# Altium PCB PCB1.PcbDoc
Units mm, origin at the board's own origin, x right, y up, seen from the top; angles counter-clockwise.
Board outline 152.4 x 101.6 mm, 2 copper layers (Top Layer, Bottom Layer); 20 components, 7 nets, 157 pads, 1 vias.
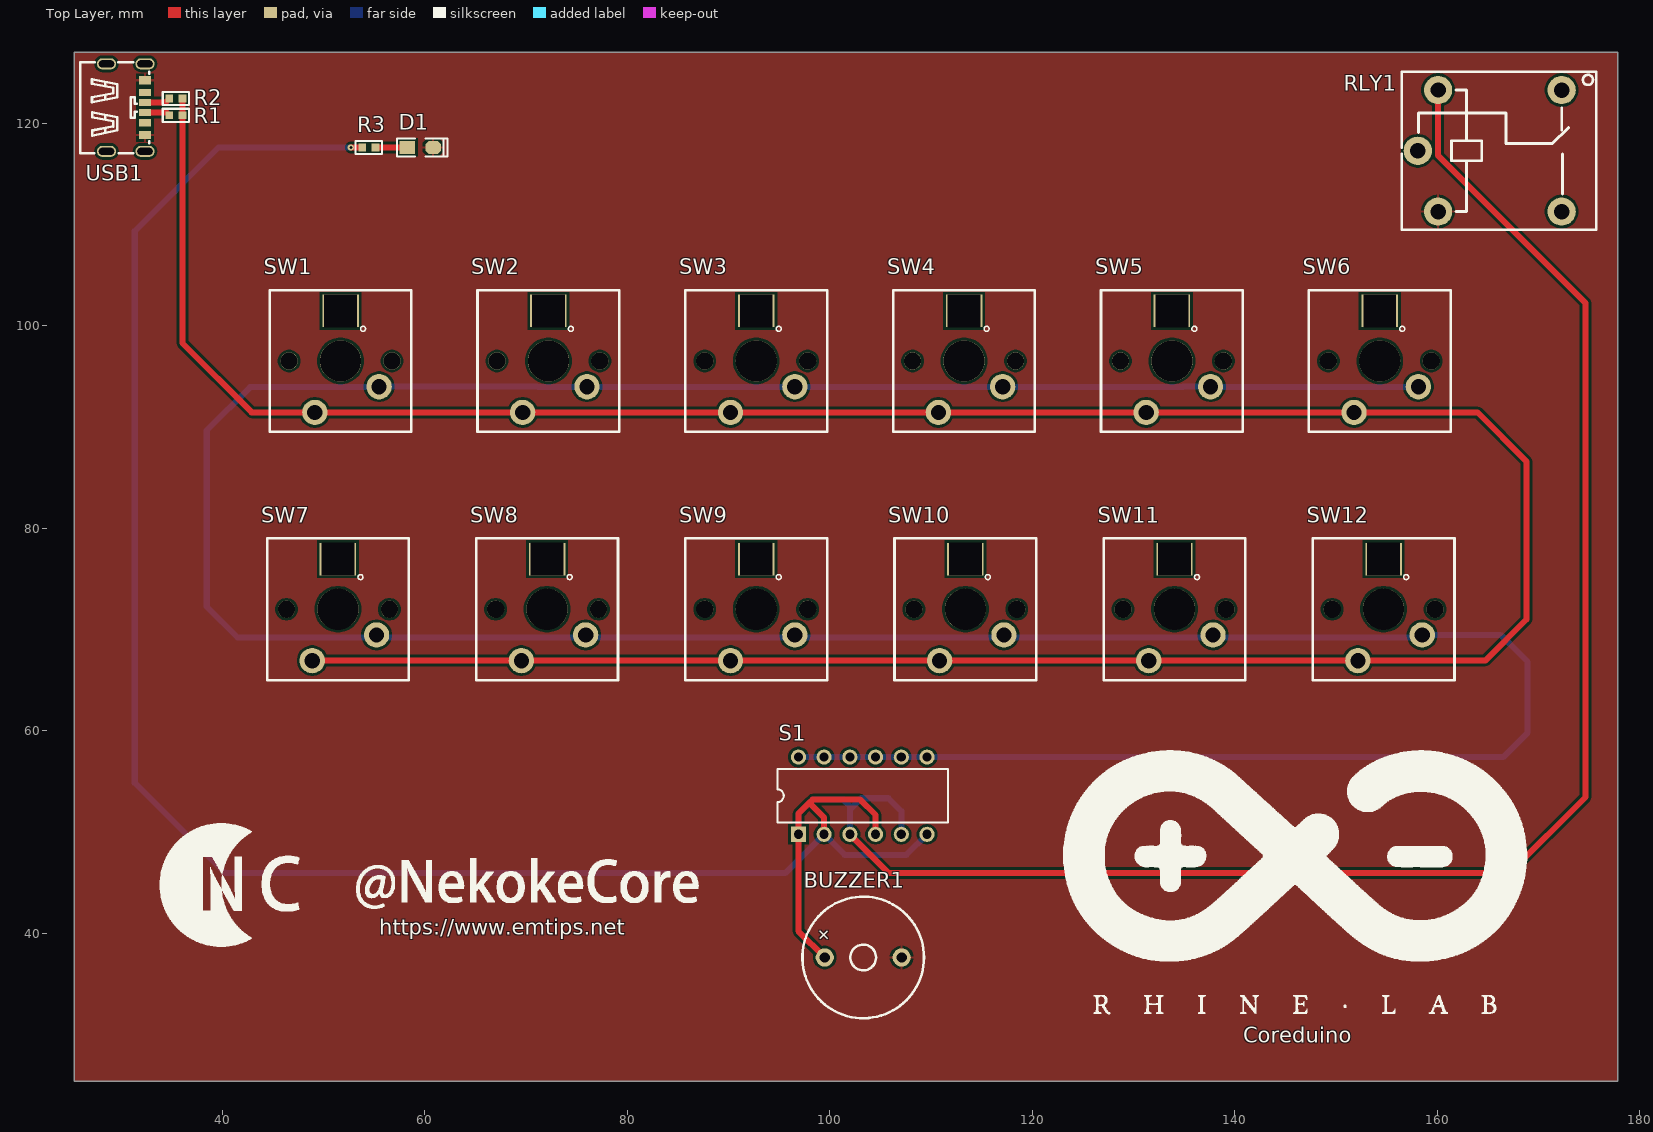
[diagram p0: Top Layer view]
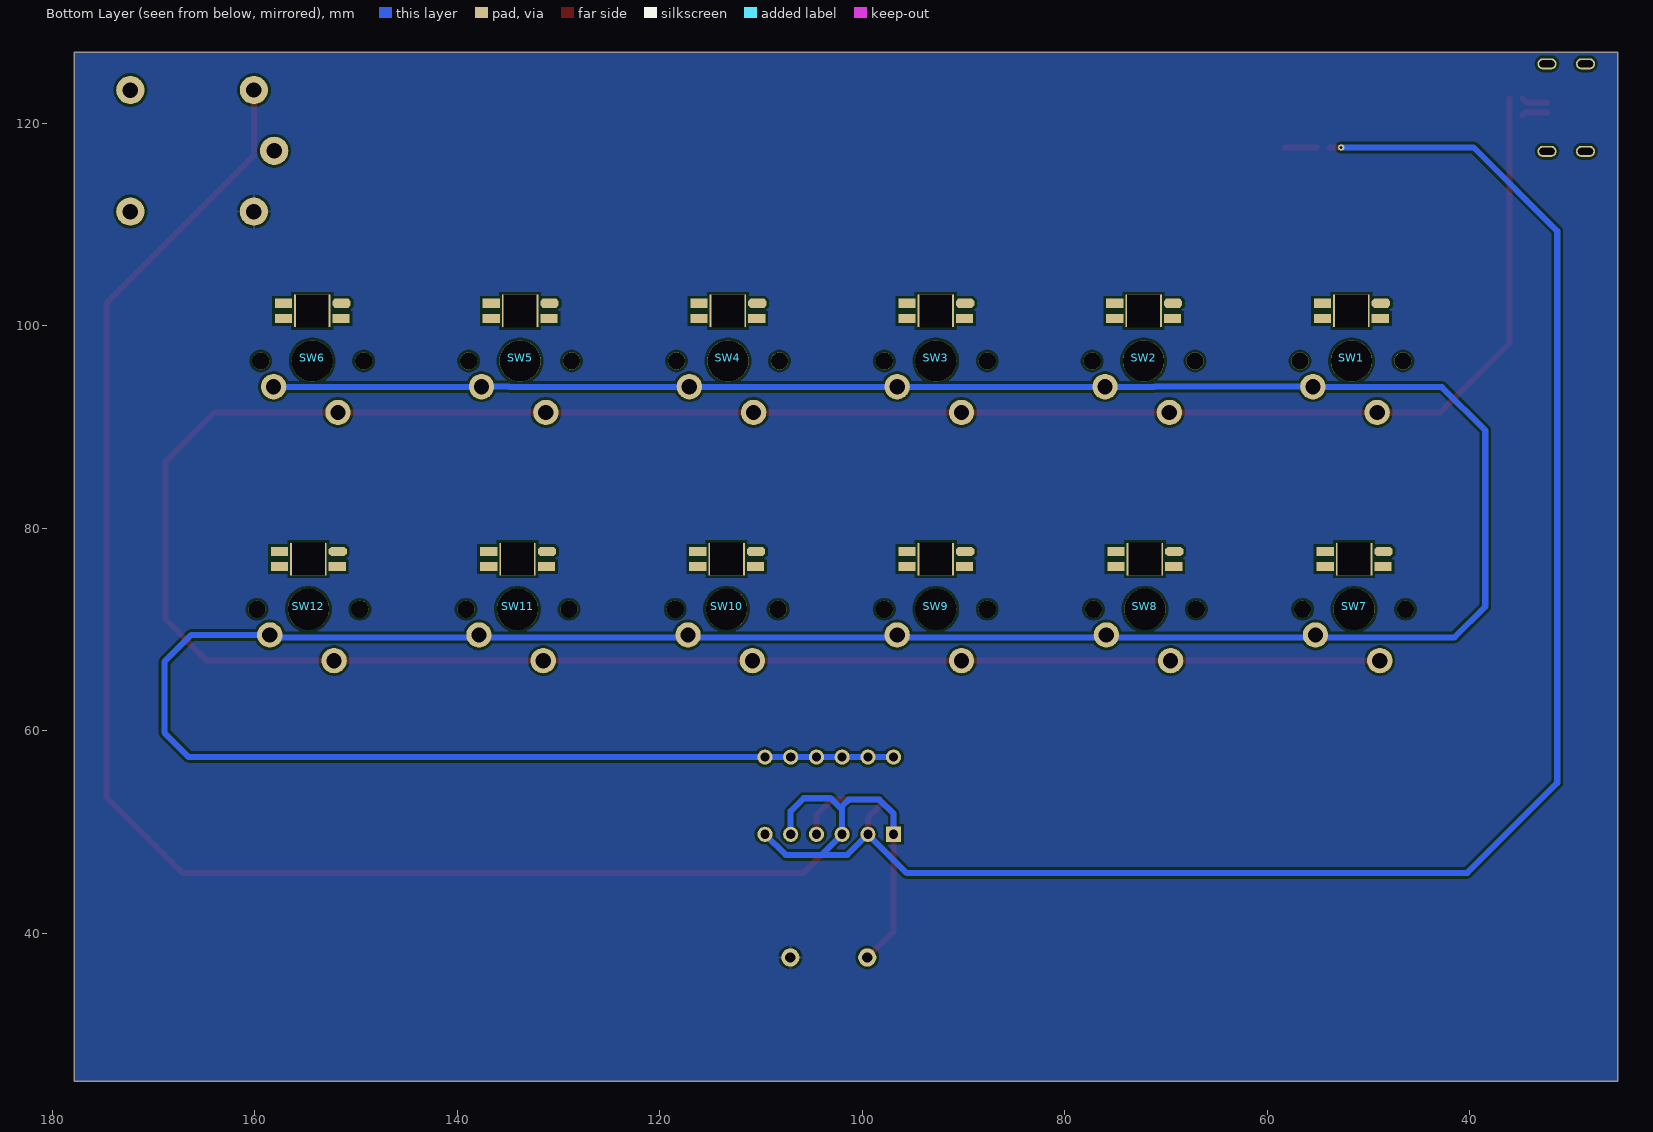
[diagram p1: Bottom Layer view, seen from below]
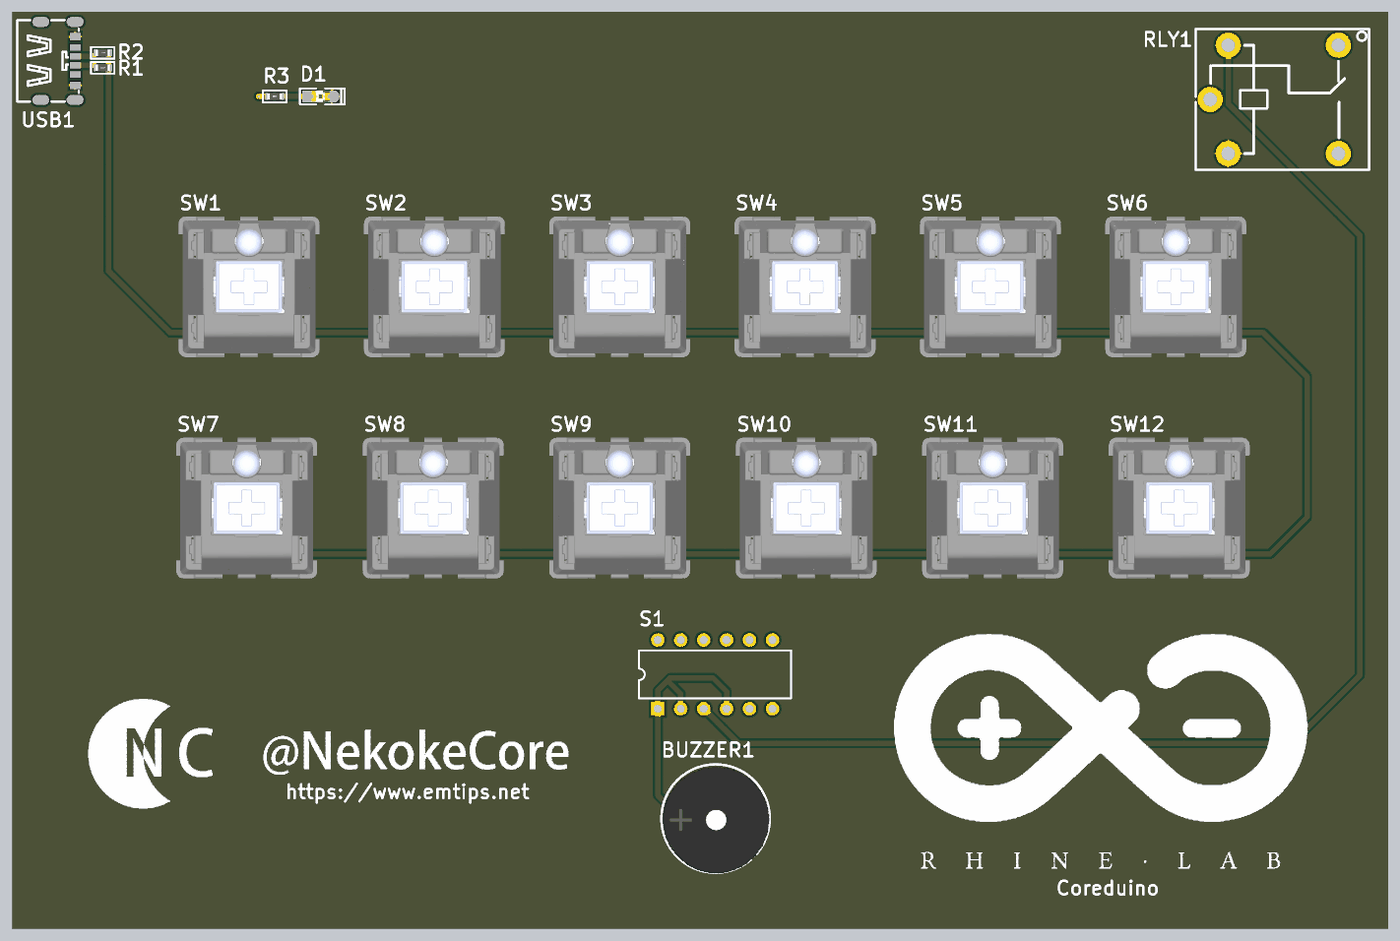
[diagram p2: 3D render of the assembled board from above, using the file's embedded part models]

## Layer stack, top to bottom
Top Solder: solder mask 0.0102, Solder Resist, Dk 3.5
Top Layer: signal copper 0.0356
Dielectric 1: dielectric 0.32, FR-4, Dk 4.8
Bottom Layer: signal copper 0.0356
Bottom Solder: solder mask 0.0102, Solder Resist, Dk 3.5

## Board outline
25.4,25.4 177.8,25.4 177.8,127 25.4,127

## Design rules (kind name [scope] priority, off if disabled: settings)
Clearance [All] p1: gap=0.254 ignorepadtopadclearanceinfootprint=FALSE except(0: Arc-Hole Track-Hole SMDPad-Hole THPad-Hole Via-Hole Fill-Hole Poly-Hole Region-Hole Text-Hole)
PolygonConnect [All] p1: connectstyle=Relief reliefconductorwidth=0.254 reliefentries=4 polygonreliefangle="90 Angle" airgapwidth=0.254
RoutingVias [All] p1: holewidth=0.711 width=1.27 viastyle="Through Hole" minholewidth=0.711 minwidth=1.27 maxholewidth=0.711 maxwidth=1.27
SolderMaskExpansion [All] p1: expansion=0.102 istentingtop=FALSE
Width [All] p1: maxlimit=0.7 minlimit=0.254 preferedwidth=0.6
Width WidthOUT [InNet('OUT')] p2: maxlimit=0.7 minlimit=0.254 preferedwidth=0.6
Width WidthVCC [InNet('VCC5V')] p3: maxlimit=0.7 minlimit=0.254 preferedwidth=0.6
30 further rules are at their usual default settings.

## Components (designator, comment, footprint, x,y, rotation, side; value= is the part's Value field where it differs from the comment)
BUZZER1 "Speaker" Speaker 103.251,37.592 r0 top
D1 "LED" "LED 0805R" 59.563,117.602 r0 top
R1 "R 0603_L" "R 0603_L" 35.433,120.777 r0 top value=1K
R2 "R 0603_L" "R 0603_L" 35.433,122.428 r0 top value=1K
R3 "R 0603_L" "R 0603_L" 54.483,117.602 r0 top value=1K
RLY1 "SRD-05VDC-SL-C" SRD-05VDC-SL-C 166.243,117.475 r0 top
S1 "SW DIP-6" DIP-12/SW 103.251,53.594 r0 top
SW1 "MX_SW" MX_SW-1 51.689,96.52 r0 top
SW2 "MX_SW" MX_SW-1 72.212,96.52 r0 top
SW3 "MX_SW" MX_SW-1 92.735,96.52 r0 top
SW4 "MX_SW" MX_SW-1 113.259,96.52 r0 top
SW5 "MX_SW" MX_SW-1 133.782,96.52 r0 top
SW6 "MX_SW" MX_SW-1 154.305,96.52 r0 top
SW7 "MX_SW" MX_SW-1 51.435,72.009 r0 top
SW8 "MX_SW" MX_SW-1 72.085,72.009 r0 top
SW9 "MX_SW" MX_SW-1 92.735,72.009 r0 top
SW10 "MX_SW" MX_SW-1 113.386,72.009 r0 top
SW11 "MX_SW" MX_SW-1 134.036,72.009 r0 top
SW12 "MX_SW" MX_SW-1 154.686,72.009 r0 top
USB1 "TYPE-C 6P" TYPE-C-SMD_TYPE-C-6P 30.48,121.539 r270 top

## Footprints (in the part's own frame and the unit in brackets; to place one, negate y for a bottom-side part, rotate by r counter-clockwise, add the part's x,y. Pads: shape width x height; smd on the part's side, far side on the other; paste and mask are expansions set on the pad)
DIP-12/SW [mm] "DIP Switch; 12 Leads"
  rect 1.5x1.5 hole 0.9: 1(-6.35,-3.81)
  round 1.5 hole 0.9: 2(-3.81,-3.81) 3(-1.27,-3.81) 4(1.27,-3.81) 5(3.81,-3.81) 6(6.35,-3.81) 7(6.35,3.81) 8(3.81,3.81) 9(1.27,3.81) 10(-1.27,3.81) 11(-3.81,3.81) 12(-6.35,3.81)
  silkscreen extent -8.43,-2.65 8.41,2.65
"LED 0805R" [mil] "红色0805LED                                       淘宝ID:黄晶宝石"
  rect 60x50 smd: 1(-50,0)
  oct 60x50 smd: 2(50,0)
  silkscreen extent -90,-35 105,35, body extent -39,-25 39,25, height 32
MX_SW-1 [mm] "with Fixation pins  1-Pole w/Diode"
  round 2.5 hole 1.5: 1(3.81,-2.54) 2(-2.54,-5.08)
  rect 1.7x0.9 smd far side: 3(2.85,4.203) 4(2.85,5.703) 6(-2.85,4.203)
  oct 1.8x0.9 smd far side: 5(-2.9,5.703)
  round 1.702 hole 1.702: ""(-5.08,0) ""(5.08,0)
  round 4.064 hole 4.064: ""(0,0)
  rect 3.6x3.2 hole 3.2 square: ""(0,4.953)
  silkscreen extent -7,-7 7,7, body extent -7.85,-7.8 7.75,7.8, height 15.4
"R 0603_L" [mil] "1/10W贴片电阻                 淘宝ID:黄晶宝石"
  rect 30x30 smd: 1(-25.59,0) 2(25.59,0)
  silkscreen extent -51,-26 51,26, body extent -31,-16 32,16, height 16
Speaker [mm]
  round 1.8 hole 1: 1(-3.752,0.031) 2(3.848,0.031)
  silkscreen extent -5.95,-5.97 6.05,6.03, body extent -5.81,-6.05 6.04,5.8, height 9.6
SRD-05VDC-SL-C [mil]
  round 110 hole 60: 1(-243.3,-244.13) 2(237.01,-244.11) 3(237.01,228.29) 4(-243.3,228.31) 5(-322.04,-7.91)
  silkscreen extent -385,-315 371,299, body extent -379,-300 369,290, height 591
TYPE-C-SMD_TYPE-C-6P [mm]
  oval 1.1x1.9 hole 0.7 slot 1.5 at 90 deg: 7(-4.32,-1.9) 7(-4.32,1.9) 7(4.32,-1.9) 7(4.32,1.9)
  rect 0.7x1.2 smd: A5(-0.5,1.9) A9(1.5,1.9) B5(0.5,1.9) B9(-1.5,1.9)
  rect 0.8x1.2 smd: A12(2.7,1.9) B12(-2.7,1.9)
  silkscreen extent -4.5,-4.5 4.5,2.3

## Part data
BUZZER1: BOM_JLCPCB Part Class="Extended Part", BOM_Manufacturer=FUET, BOM_Manufacturer Part=FMB1275-05, Frequency=2300Hz, BOM_Supplier=LCSC, BOM_Supplier Part=C482357, Contributor=LCSC, spicePre=B, spiceSymbolName=FMB1275-05
D1: library part "LED 0805R 红", "Typical INFRARED GaAs LED", LatestRevisionDate=08-Jul-2005, LatestRevisionNote="Mech Layer 1 removed.", PackageDescription="LED; 2 Leads", PackageReference=LED-0, Published=8-Jun-2000, Publisher="Altium Limited"
R1 R2 R3: "Resistor", LatestRevisionDate=17-Jul-2002, LatestRevisionNote="Re-released for DXP Platform.", PackageDescription="Axial Device, Thru-Hole; 2 Leads; 0.4 in Pin Spacing", PackageReference=AXIAL-0.4, Published=8-Jun-2000, Publisher="Altium Limited"
RLY1: BOM_JLCPCB Part Class="Extended Part", BOM_Manufacturer=SONGLE, BOM_Manufacturer Part=SRD-05VDC-SL-C, BOM_Supplier=LCSC, BOM_Supplier Part=C35449, spicePre=R, spiceSymbolName=SRD-05VDC-SL-C
S1: "DIP Switch, 6 Position, SPST", LatestRevisionDate=17-Jul-2002, LatestRevisionNote="Re-released for DXP Platform.", PackageDescription="DIP Switch; 12 Leads", PackageReference=DIP-12/SW, Published=24-Mar-1999, Publisher="Altium Limited"
SW1 SW2 SW3 SW4 SW5 SW6 SW7 SW8 SW9 SW10 SW11 SW12: library part MX_SW-1
USB1: BOM_JLCPCB Part Class="Extended Part", BOM_Manufacturer="SHOU HAN", BOM_Manufacturer Part="TYPE-C 6P", BOM_Supplier=LCSC, BOM_Supplier Part=C456012, Contributor=LCSC, spicePre=U, spiceSymbolName="TYPE-C 6P"

## Via types
v1: diameter 0.61, hole 0.305, Top Layer to Bottom Layer, 1 vias

## Nets (pads, with @x,y where several pads share a name; then routed paths per layer and width w, separated by ;. In a path a pad name is that pad's centre, name@x,y a point inside that pad or via, vN(x,y) a via of type N, cw(c..) or ccw(c..) an arc to the next point about the centre after c; other vN are vias at no path point)
GND: BUZZER1.2 D1.2 RLY1.1 USB1.A12 USB1.B12
NetBUZZER1_1: BUZZER1.1 R3.1 RLY1.4 S1.1 S1.2 S1.3 S1.4 S1.5 S1.6 | length 370.4
  Top Layer w0.6: v1(52.705,117.602) R3.1 ; S1.2 99.441,51.435 97.98,52.895 ; BUZZER1.1 96.901,40.221 S1.1 96.901,51.816 97.98,52.895 ; S1.3 105.791,45.974 167.132,45.974 174.625,53.467 174.625,102.235 160.063,116.797 RLY1.4 ; S1.4 104.521,51.689 102.997,53.213 98.298,53.213 97.98,52.895
  Bottom Layer w0.6: v1(52.705,117.602) 39.624,117.602 31.369,109.347 31.369,54.864 40.259,45.974 95.631,45.974 S1.2 101.473,47.752 104.013,47.752 ; S1.1 96.901,51.816 98.298,53.213 101.346,53.213 101.981,52.578 101.981,52.197 ; S1.5 107.061,52.07 105.791,53.34 103.124,53.34 101.981,52.197 ; S1.6 107.569,47.752 104.013,47.752 ; 101.981,52.197 S1.3 104.013,47.752
NetD1_1: D1.1 R3.2 | length 3.2
  Top Layer w0.6: R3.2 D1.1
NetR1_1: R1.1 USB1.B5 | length 2.5
  Top Layer w0.6: USB1.B5 34.521,121.039 R1.1
NetR2_1: R2.1 USB1.A5 | length 2.6
  Top Layer w0.6: USB1.A5 34.394,122.039 R2.1
OUT: S1.7 S1.8 S1.9 S1.10 S1.11 S1.12 SW1.1 SW2.1 SW3.1 SW4.1 SW5.1 SW6.1 SW7.1 SW8.1 SW9.1 SW10.1 SW11.1 SW12.1 | length 351.8
  Bottom Layer w0.6: S1.12 S1.11 S1.10 S1.9 S1.8 S1.7 166.497,57.404 168.91,59.817 168.91,66.802 166.243,69.469 SW12.1 158.242,69.215 41.529,69.215 38.481,72.263 38.481,89.662 42.753,93.934 55.453,93.934 SW1.1 71.095,93.98 71.141,93.934 134.853,93.934 134.899,93.98 SW5.1 137.638,93.934 158.069,93.934 SW6.1
VCC5V: R1.2 R2.2 SW1.2 SW2.2 SW3.2 SW4.2 SW5.2 SW6.2 SW7.2 SW8.2 SW9.2 SW10.2 SW11.2 SW12.2 | length 298.9
  Top Layer w0.6: R2.2 R1.2 36.083,98.283 42.926,91.44 SW1.2 SW2.2 SW3.2 SW4.2 SW5.2 SW6.2 163.957,91.44 168.783,86.614 168.783,70.993 164.719,66.929 SW12.2 SW11.2 SW10.2 SW9.2 SW8.2 SW7.2
pads on no net: RLY1.2 RLY1.3 RLY1.5 SW1. SW1.3 SW1.4 SW1.5 SW1.6 SW2. SW2.3 SW2.4 SW2.5 SW2.6 SW3. SW3.3 SW3.4 SW3.5 SW3.6 SW4. SW4.3 SW4.4 SW4.5 SW4.6 SW5. SW5.3 SW5.4 SW5.5 SW5.6 SW6. SW6.3 SW6.4 SW6.5 SW6.6 SW7. SW7.3 SW7.4 SW7.5 SW7.6 SW8. SW8.3 SW8.4 SW8.5 SW8.6 SW9. SW9.3 SW9.4 SW9.5 SW9.6 SW10. SW10.3 SW10.4 SW10.5 SW10.6 SW11. SW11.3 SW11.4 SW11.5 SW11.6 SW12. SW12.3 SW12.4 SW12.5 SW12.6 USB1.7 USB1.A9 USB1.B9

## Polygon pours and split planes (outlines as drawn)
GND on Bottom Layer "GND_L02_P001" (solid, pour order 1): 25.4,127 177.8,127 177.8,25.4 25.4,25.4
GND on Top Layer "GND_L01_P000" (solid, pour order 0): 25.4,127 177.8,127 177.8,25.4 25.4,25.4

## Silkscreen, mask and mechanical layers (free items; w line width, h text height)
Top Overlay:
  drawing of 5105 lines, arcs and shapes, not listed
  text "https://www.emtips.net" at 55.499,39.878 h1.52
  text "Coreduino" at 140.843,29.21 h1.52
Mechanical 1:
  the board outline again, w1.2

## Text inside footprints (layer, text, board x,y; h text height)
BUZZER1: Top Overlay "+" at 99.303,38.939 h1.27 r45